# Altium PCB Recepteur.PcbDoc
Units mil, origin at the board's own origin, x right, y up, seen from the top; angles counter-clockwise.
Board outline 3937.01 x 3937.01 mil, 2 copper layers (Top Layer, Bottom Layer); 49 components, 27 nets, 122 pads, 14 vias.
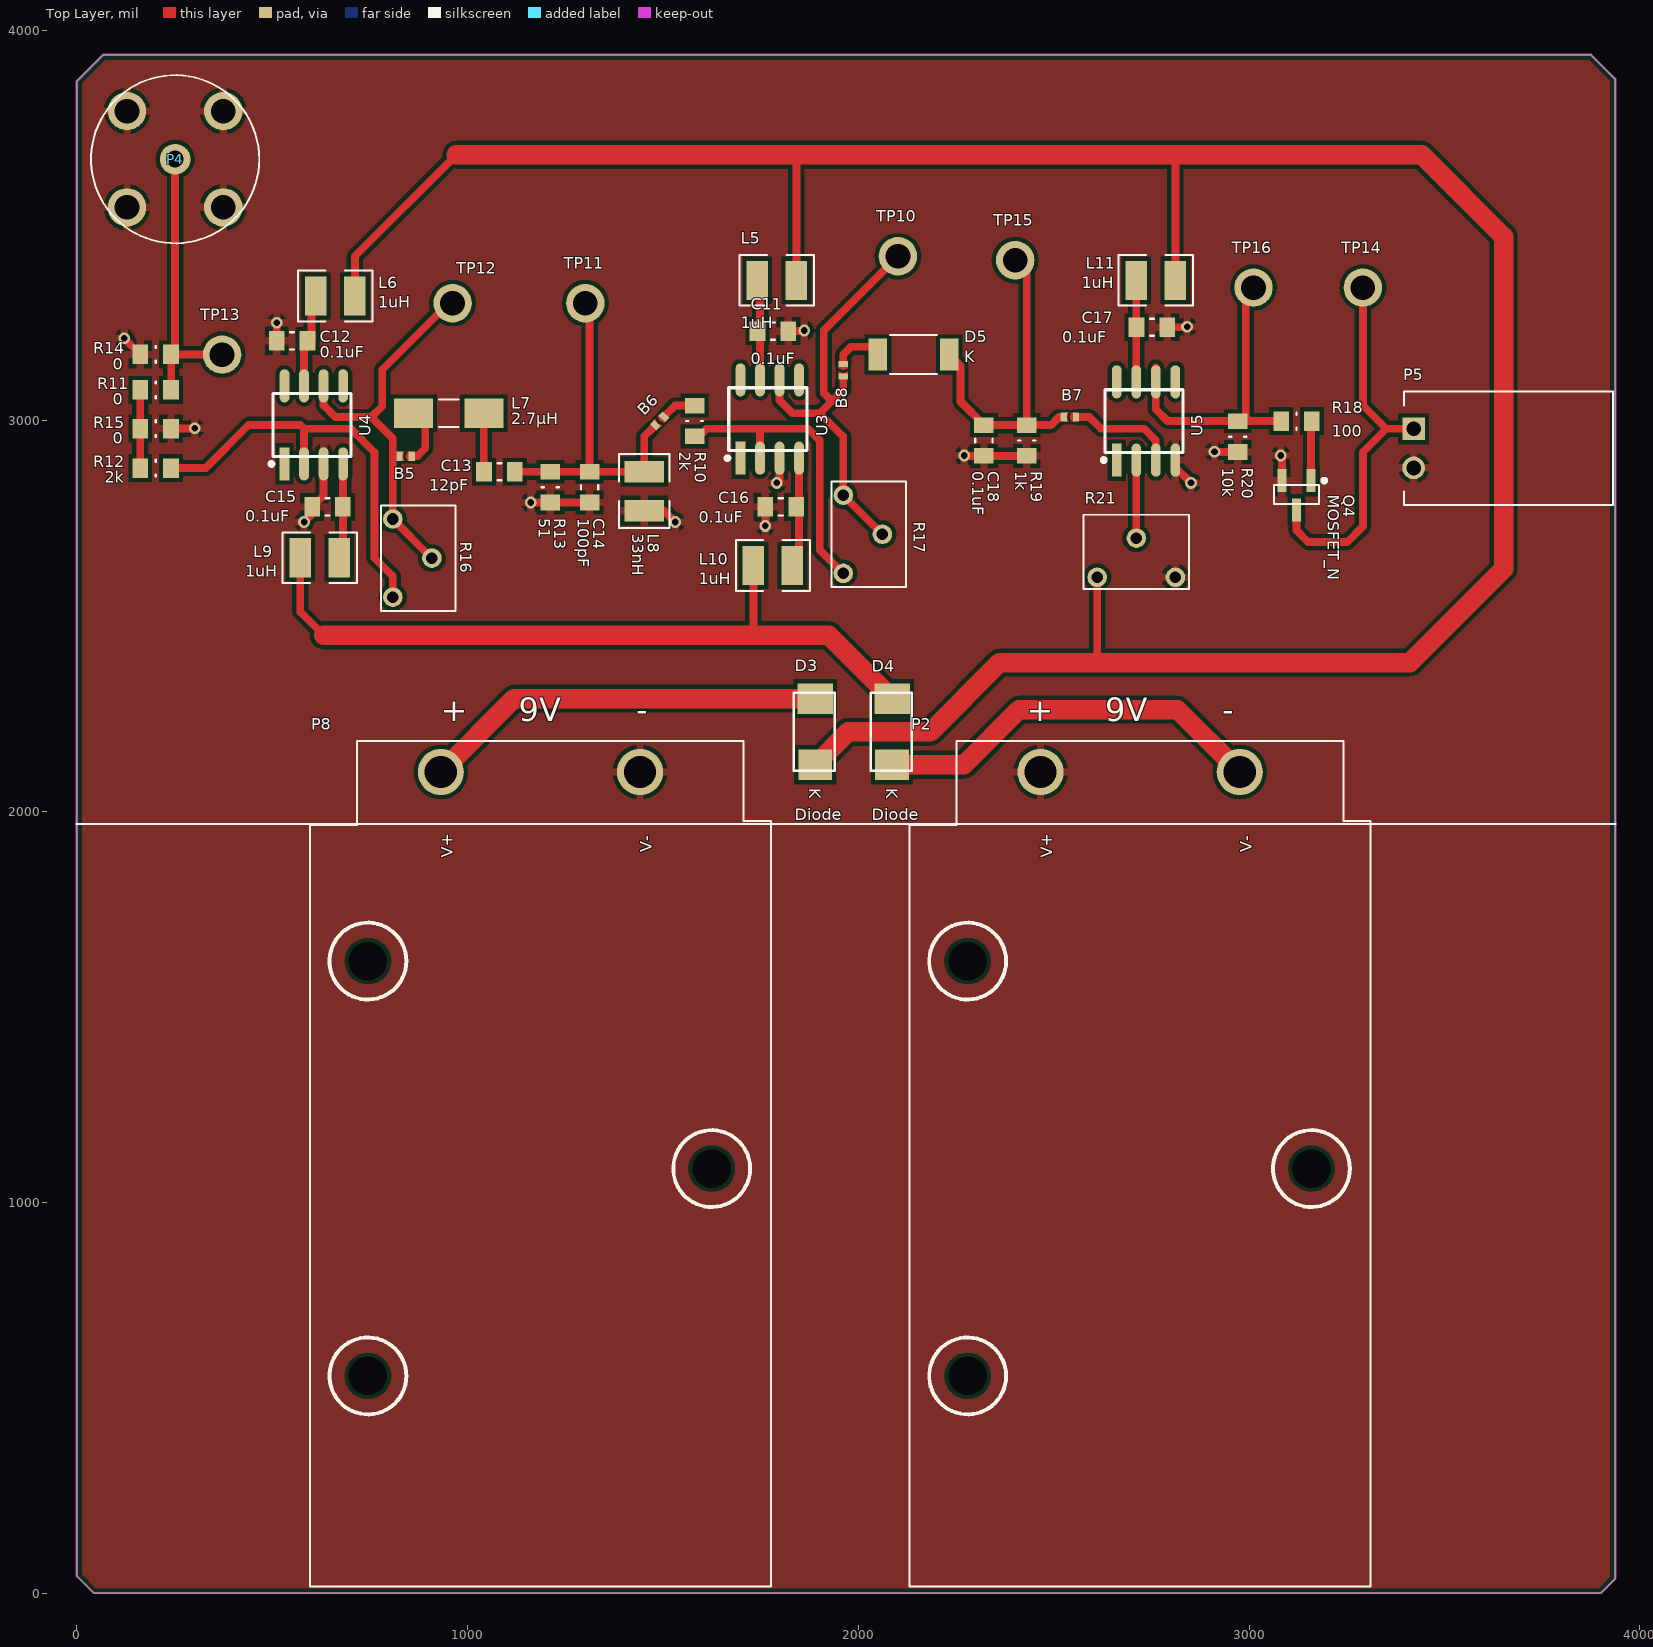
[diagram p0: Top Layer view]
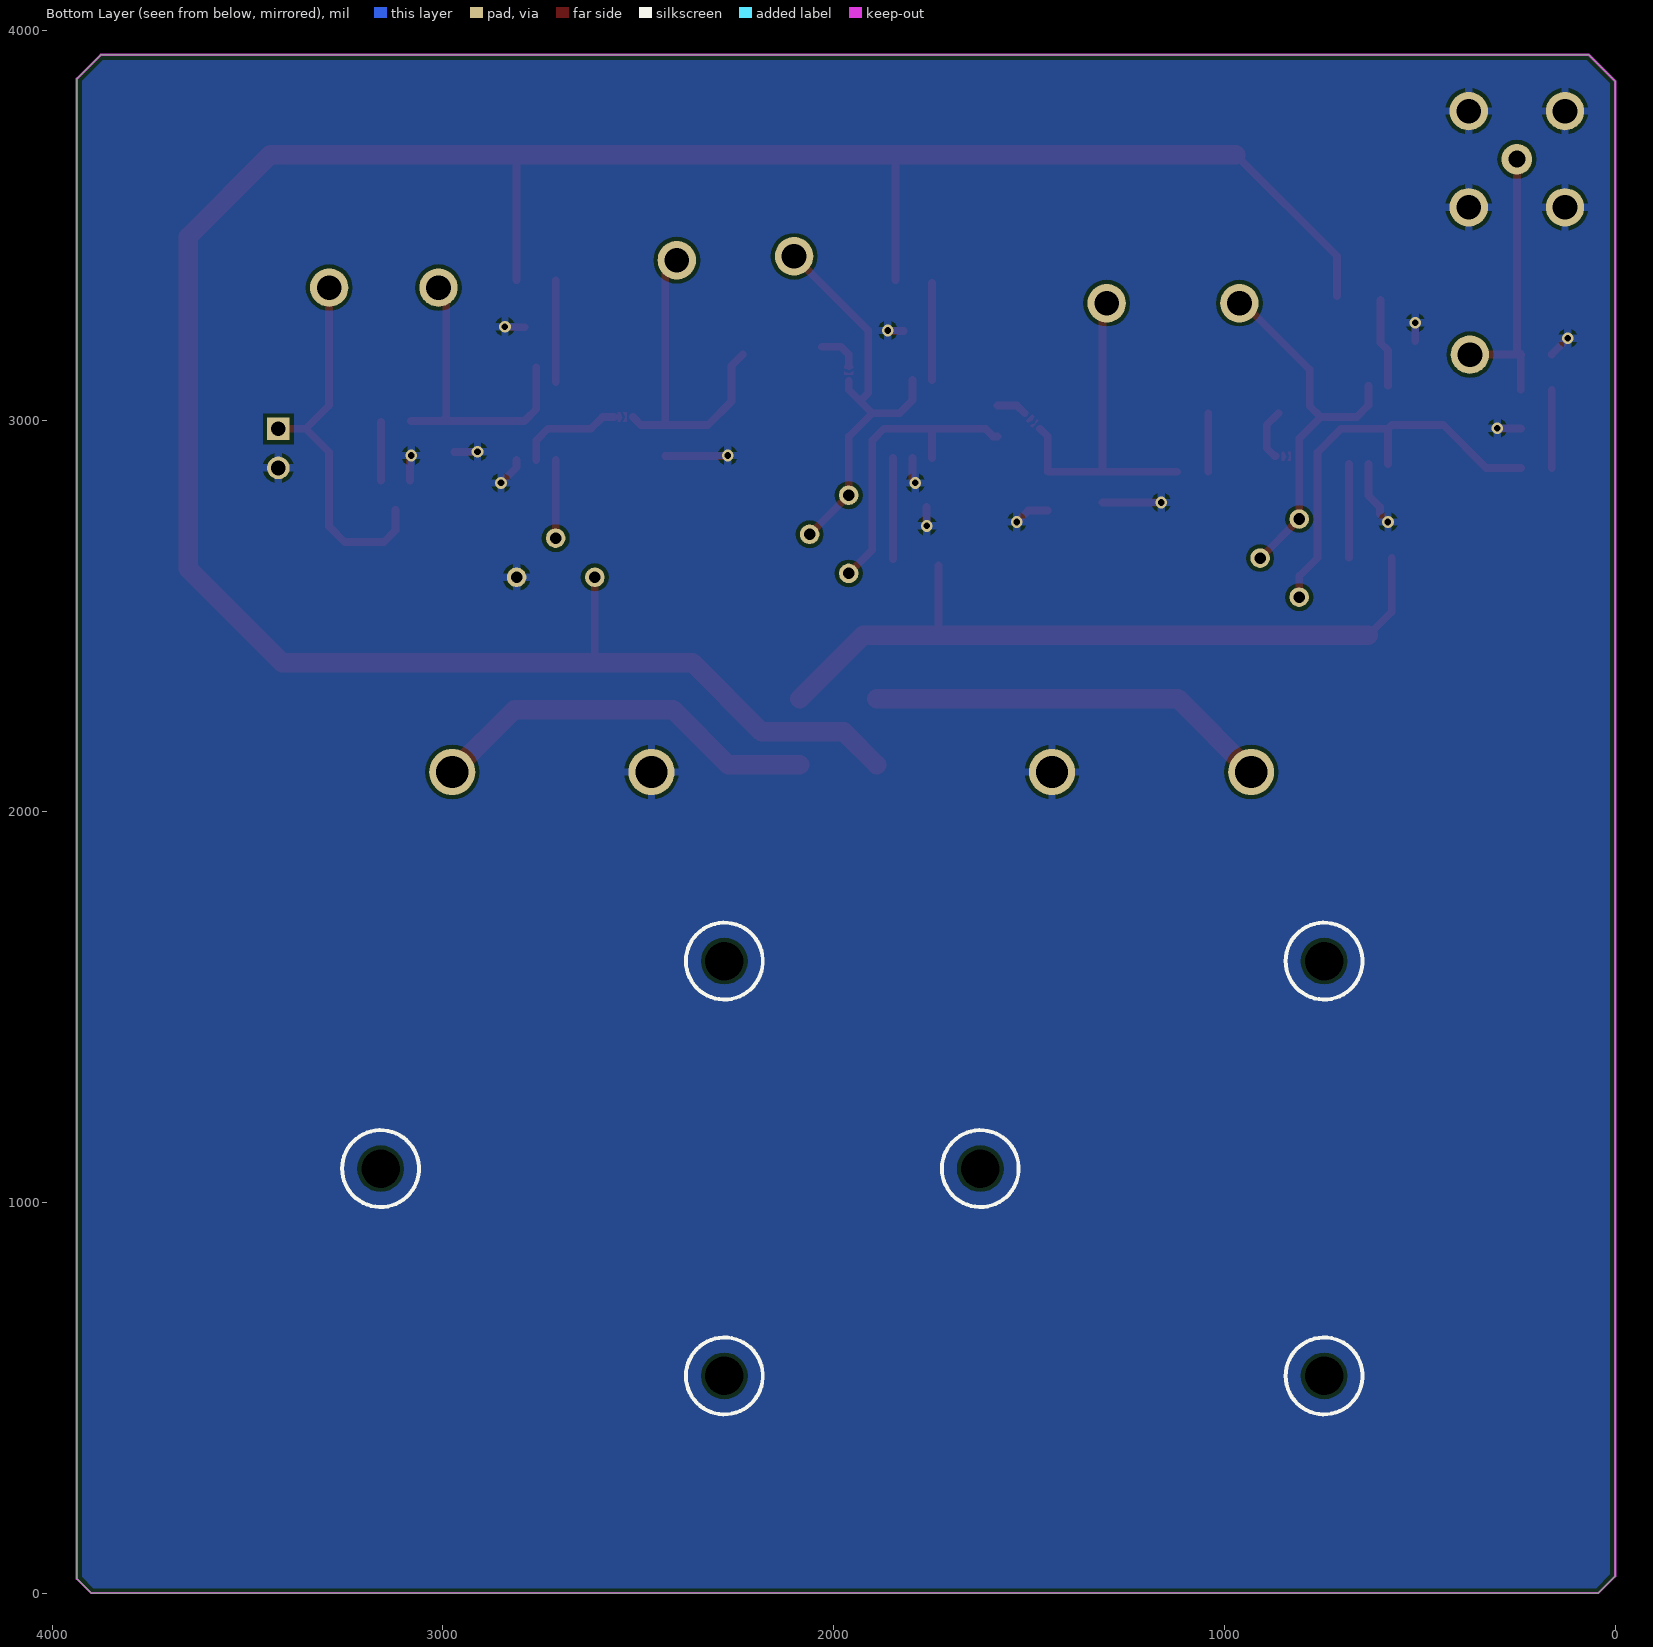
[diagram p1: Bottom Layer view, seen from below]
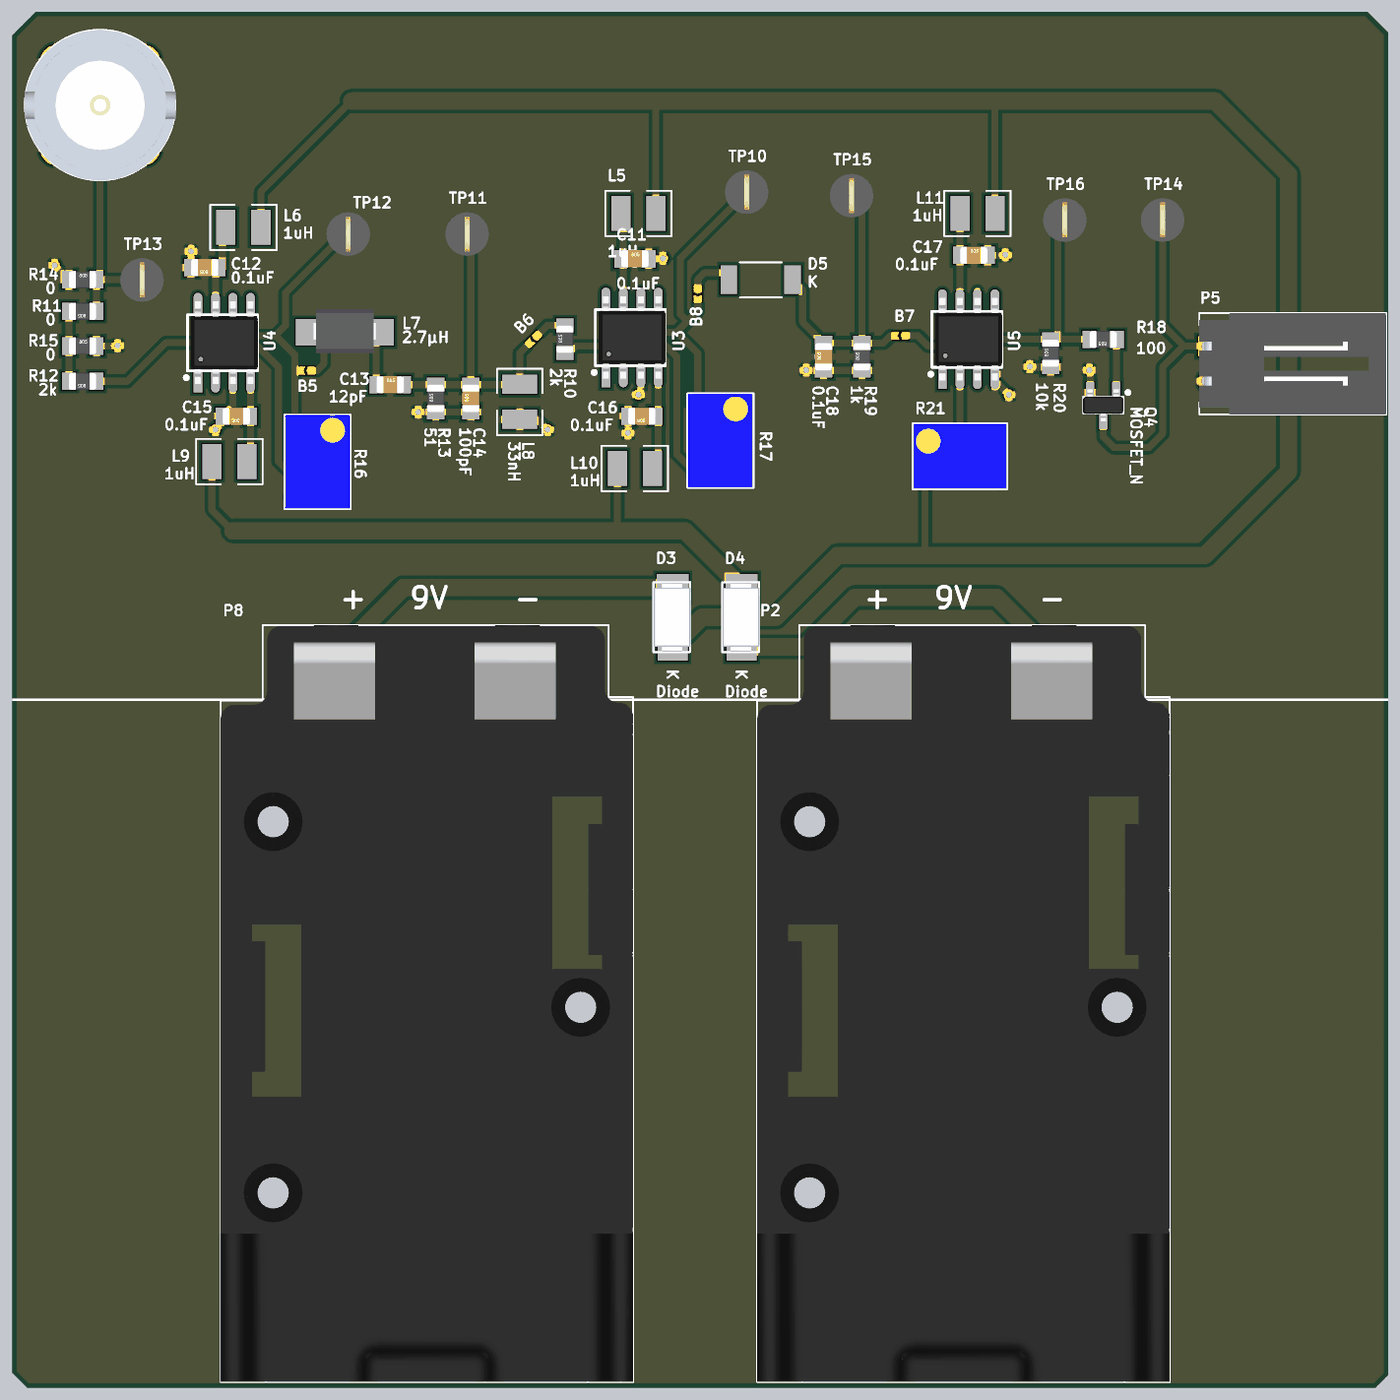
[diagram p2: 3D render of the assembled board from above, using the file's embedded part models]

## Layer stack, top to bottom
Top Layer: signal copper 1.4
Dielectric: dielectric 12.6, FR-4, Dk 4.8
Bottom Layer: signal copper 1.4

## Board outline
42.99,0 0,42.99 0,3870 67.01,3937.01 3875.98,3937.01 3937.01,3875.98 3937.01,37.01 3900,0

## Design rules (kind name [scope] priority, off if disabled: settings)
Clearance [HasFootprint('BRIDGE_SMALL')] p1: gap=6
Clearance Clearance_1 [All] p2: gap=10
HoleSize [All] p1: absolutevalues=TRUE maxlimit=100 minlimit=12 maxpercent=80.000 minpercent=20.000
MinimumSolderMaskSliver [All] p1: minsoldermaskwidth=8
PolygonConnect [All] p1: connectstyle=Relief reliefconductorwidth=20 reliefentries=4 polygonreliefangle="90 Angle"
RoutingVias [All] p1: holewidth=17 width=30 viastyle="Through Hole" minholewidth=17 minwidth=30 maxholewidth=28 maxwidth=50
SilkToSilkClearance [All] p1: silktosilkclearance=8
SilkscreenOverComponentPads [IsPad] p1: minsilkscreentomaskgap=8
SolderMaskExpansion [All] p1: expansion=4
Width [All] p1: maxlimit=50 minlimit=20 preferedwidth=20 minimp=50.000000 maximp=50.000000 favimp=50.000000
24 further rules are at their usual default settings.

## Components (designator, comment, footprint, x,y, rotation, side; value= is the part's Value field where it differs from the comment)
B5 "BRIDGE" BRIDGE_SMALL 841.5,2910 r0 top
B6 "BRIDGE" BRIDGE_SMALL 1491.5,3000 r45 top
B7 "BRIDGE" BRIDGE_SMALL 2541.5,3010 r0 top
B8 "BRIDGE" BRIDGE_SMALL 1961.5,3130 r90 top
C11 "0.1uF" "0805 - Cap Non-Polarized" 1781.5,3230 r0 top
C12 "0.1uF" "0805 - Cap Non-Polarized" 550.87,3205.01 r180 top
C13 "12pF" "0805 - Cap Non-Polarized" 1081.5,2870 r0 top
C14 "100pF" "0805 - Cap Non-Polarized" 1312.13,2830.64 r90 top
C15 "0.1uF" "0805 - Cap Non-Polarized" 641.5,2780 r180 top
C16 "0.1uF" "0805 - Cap Non-Polarized" 1801.5,2780 r180 top
C17 "0.1uF" "0805 - Cap Non-Polarized" 2751.5,3240 r0 top
C18 "0.1uF" "0805 - Cap Non-Polarized" 2321.5,2950 r90 top
D3 "Diode" "DOS-214AC (SMA)" 1889.76,2204.72 r270 top
D4 "Diode" "DOS-214AC (SMA)" 2086.61,2204.72 r270 top
D5 "Diode Schottky" SMBflat 2141.5,3170 r0 top
L5 "1uH" "1008 - INDUCTOR" 1791.5,3360 r0 top
L6 "1uH" "1008 - INDUCTOR" 661.5,3320 r0 top
L7 "2.7µH" "1812 - Inductor" 951.5,3020 r0 top
L8 "33nH" "1008 - INDUCTOR" 1452.13,2820.64 r90 top
L9 "1uH" "1008 - INDUCTOR" 621.5,2650 r0 top
L10 "1uH" "1008 - INDUCTOR" 1781.5,2630 r0 top
L11 "1uH" "1008 - INDUCTOR" 2761.5,3360 r0 top
P2 "Battery Holder" "Battery Holder - 9V - THT" 2466.5,2101.5 r90 top
P4 "Coax-F" Coax-BNC-THT-Vertical 251.5,3670 r0 top
P5 "Header 1X2" "Headers - 1x2 - R/A - Lock" 3421.5,2980 r270 top
P8 "Battery Holder" "Battery Holder - 9V - THT" 931.5,2101.5 r90 top
Q4 "MOSFET_N" SOT23-3 3121.5,2810 r270 top
R10 "2k" "0805 - Resistor" 1581.5,3000 r90 top
R11 "0" "0805 - Resistor" 201.5,3080 r180 top
R12 "2k" "0805 - Resistor" 201.5,2880 r180 top
R13 "51" "0805 - Resistor" 1212.13,2830.64 r90 top
R14 "0" "0805 - Resistor" 201.5,3170 r0 top
R15 "0" "0805 - Resistor" 201.5,2980 r0 top
R16 "Pot" TT-67Y 808.5,2749 r90 top
R17 "Pot" TT-67Y 1961.5,2810 r90 top
R18 "100" "0805 - Resistor" 3121.5,3000 r180 top
R19 "1k" "0805 - Resistor" 2431.5,2950 r90 top
R20 "10k" "0805 - Resistor" 2971.5,2960 r90 top
R21 "Pot" TT-67Y 2611.5,2600 r180 top
TP10 "TP" TP-THT-Vertical-1 2101.5,3421.5 r90 top
TP11 "TP" TP-THT-Vertical-1 1301.5,3301.5 r90 top
TP12 "TP" TP-THT-Vertical-1 961.5,3301.5 r90 top
TP13 "TP" TP-THT-Vertical-1 371.5,3170 r90 top
TP14 "TP" TP-THT-Vertical-1 3291.5,3341.5 r90 top
TP15 "TP" TP-THT-Vertical-1 2401.5,3411.5 r90 top
TP16 "TP" TP-THT-Vertical-1 3011.5,3341.5 r90 top
U3 "LM7121" "SOIC8 - 0.150" 1698.5,2905 r0 top
U4 "LM7121" "SOIC8 - 0.150" 531.5,2890 r0 top
U5 "LM7121" "SOIC8 - 0.150" 2661.5,2900 r0 top

## Footprints (in the part's own frame and the unit in brackets; to place one, negate y for a bottom-side part, rotate by r counter-clockwise, add the part's x,y. Pads: shape width x height; smd on the part's side, far side on the other; paste and mask are expansions set on the pad)
"0805 - Cap Non-Polarized" [mil]
  rect 40x50 smd: 1(-39.38,-0.01) 2(39.36,-0.01)
  silkscreen extent -5,-22 5,22, body extent -39,-25 39,25, height 31
"0805 - Resistor" [mil]
  rect 40x50 smd: 1(-39.38,0.39) 2(39.36,0.39)
  silkscreen extent 0,-21 0,22, body extent -39,-24 39,25, height 31
"1008 - INDUCTOR" [mil]
  rect 55x100 smd: 1(-50,0) 2(50,0)
  silkscreen extent -95,-65 95,65, body extent -49,-39 49,39, height 71
"1812 - Inductor" [mil]
  rect 100x75 smd: 1(-90,0) 2(90,0)
  silkscreen extent -25,-35 25,35, body extent -89,-60 89,66, height 126
"Battery Holder - 9V - THT" [mm]
  round 3 hole 2.1: 1(0,0) 2(0,-12.95)
  round 2 hole 2.5 unplated: ""(-39.26,4.74) ""(-25.78,-17.61) ""(-12.29,4.74)
  Bottom Overlay keep-out circle w0.254: c-39.26,4.74 r2.5
  Bottom Overlay keep-out circle w0.254: c-12.29,4.74 r2.5
  Bottom Overlay keep-out circle w0.254: c-25.78,-17.61 r2.5
  silkscreen extent -52.96,-21.46 2.03,8.51, body extent -52.96,-21.46 2.03,8.51, height 21.31
BRIDGE_SMALL [mm] "Chip Resistor, Body 1.6x0.8mm, IPC Medium Density"
  rect 0.4x0.6 smd paste-5: 1(-0.4,0) 2(0.4,0)
  Top Layer region: -0.08,0.3 -0.2,0 -0.08,-0.3 -0.3,-0.3 -0.3,0.3
  Top Layer region: 0.12,0.3 0,0 0.12,-0.3 0.3,-0.3 0.3,0.3
Coax-BNC-THT-Vertical [mm]
  round 2 hole 1.1: 1(0,0)
  round 2.5 hole 1.6: 2(3.13,3.13) 3(-3.13,3.13) 4(-3.13,-3.13) 5(3.13,-3.13)
  silkscreen extent -5.46,-5.47 5.47,5.47, body extent -5.5,-5.52 5.5,5.48, height 13.7
"DOS-214AC (SMA)" [mm]
  rect 2x2.3 smd: 1(-2.148,0)
  rect 2x2.2 smd: 2(2.148,0)
  silkscreen extent -2.54,-1.4 2.54,1.27, body extent -2.5,-1.39 2.5,1.31, height 2.15
"Headers - 1x2 - R/A - Lock" [mil]
  rect 58x58 hole 38: 1(0,0)
  round 58 hole 38: 2(100,0)
  silkscreen extent -95,-25 195,510, body extent -95,-25 195,510, height 280
SMBflat [mm]
  rect 1.2x2.07 smd: 1(-2.32,0) 2(2.32,0)
  silkscreen extent -1.52,-1.27 1.52,1.27
"SOIC8 - 0.150" [mil]
  rect 25x85 smd: 1(0,0)
  oval 25x85 smd: 2(50,0) 3(100,0) 4(150,0) 5(150,200) 6(100,200) 7(50,200) 8(0,200)
  silkscreen extent -38,-5 170,180, body extent -21,-18 171,218, height 67
SOT23-3 [mm]
  rect 1.5x0.6 smd: 1(-0.95,0.95) 2(-0.95,-0.95) 3(0.95,0)
  silkscreen extent -1.07,-1.45 0.58,1.93, body extent -1.19,-1.46 1.15,1.46, height 1
TP-THT-Vertical-1 [mm]
  round 2.5 hole 1.6: 1(0,0)
  body extent -1.6,-1.59 1.57,1.59, height 5.65
TT-67Y [mil]
  round 50 hole 30: 1(0,0) 2(-100,-100) 3(-200,0)
  silkscreen extent -235,-160 35,30, body extent -234,-158 34,28, height 323

## Part data
B5 B6 B7 B8: library part Jumper-solder, "Solder Jumper Bridge"
C11 C12 C15 C16 C17 C18: library part Cap-TDK-CGA-0.1uF-0805, "CAP CER 0.1UF 100V 10% X7R 0805"
C13: library part Cap-TDK-CGA-12pF-0805, "CAP CER 12PF 100V 5% NP0 0603"
C14: library part Cap-TDK-CGA-100pF-0805, "CAP CER 100PF 100V 5% NP0 0805"
D3 D4: library part S1M-13-F, "DIODE GEN PURPOSE 1000V 1A SMA"
D5: library part STPS2L40UF, "DIODE SCHOTTKY 40V 2A SMBFLAT"
L5 L6 L9 L10 L11: library part Murata-LQW2UA-Ind-AirCore-1uH, "IND 1000NH 370MA SRF 290MHZ 1008"
L7: library part Ind-Panasonic-FB-2.7µH-1812, "INDUCTOR 2.7 UH 10% 1812 SMD"
L8: library part Murata-LQW2UA-Ind-AirCore-33nH, "IND 33NH 1000MA SRF 1600MHZ 1008"
P2 P8: library part "Battery Holder-9V-THT-Open", "HOLDER BATTERY 9V PC MOUNT"
P4: library part coax-bnc-tht-vertical, "CONN BNC JACK STR 50 OHM PCB"
P5: library part Header-0.100-R/A-Lock-1X2
Q4: library part 2N7002, "MosFET Channel-N SOT-23-3 3.3A"
R10 R12: library part Yagao-RC0805-2k, "RES 2.0K OHM 1/8W 5% 0805 SMD"
R11 R14 R15: library part Jumper-0805, "RES 0.0 OHM 1/8W JUMP 0805"
R13: library part Yagao-RC0805-51, "RES 51 OHM 1/8W 5% 0805 SMD"
R16 R17 R21: library part Pot-TT67Y-20Turns-THT-10%-10k, "TRIMMER 10K OHM 0.5W TH"
R18: library part Yagao-RC0805-100, "RES 100 OHM 1/8W 5% 0805 SMD"
R19: library part Yagao-RC0805-1k, "RES 1.0K OHM 1/8W 5% 0805 SMD"
R20: library part Yagao-RC0805-10k, "RES 10K OHM 1/8W 5% 0805 SMD"
TP10 TP11 TP12 TP13 TP14 TP15 TP16: library part TP-THT-Vertical-1, "TEST POINT PC COMPACT .063\"D BLK"
U3 U4 U5: library part LM7121-8SOIC, "IC OPAMP VFB 175MHZ 8SOIC"

## Via types
v1: diameter 30, hole 17, Top Layer to Bottom Layer, 14 vias

## Nets (pads, with @x,y where several pads share a name; then routed paths per layer and width w, separated by ;. In a path a pad name is that pad's centre, name@x,y a point inside that pad or via, vN(x,y) a via of type N, cw(c..) or ccw(c..) an arc to the next point about the centre after c; other vN are vias at no path point)
+9V: D3.2 L5.2 L6.2 L11.2 R21.1 | length 6907.1
  Top Layer w20: L6.2 711.5,3421.5 971.5,3681.5 ; L5.2 1841.5,3681.5 ; 2611.5,2381.5 R21.1 ; L11.2 2811.5,3671.5
  Top Layer w50: 971.5,3681.5 1841.5,3681.5 3441.5,3681.5 3651.5,3471.5 3651.5,2621.5 3411.5,2381.5 2611.5,2381.5 2361.5,2381.5 2184.5,2204.5 1974.1,2204.5 D3.2
-9V: D4.1 L9.1 L10.1 | length 1914.2
  Top Layer w20: L9.1 571.5,2511.5 631.5,2451.5 ; 1731.5,2461.5 L10.1
  Top Layer w50: 631.5,2451.5 1924.41,2451.5 D4.1
COM: C11.2 C12.2 C14.1 C15.2 C16.2 C17.2 C18.1 L8.1 P2.1 P4.2 P4.3 P4.4 P4.5 P5.2 P8.2 Q4.2 R13.1 R14.1 R15.2 R19.1 R20.1 R21.3 U3.3 U4.3 U5.4 | length 1144.8
  Top Layer w20: v1(121.5,3211.5) 121.5,3211.01 R14.1 ; R15.2 300.39,2980.39 v1(301.5,2981.5) ; C12.2 v1(511.5,3251.5) ; v1(581.5,2741.5) 602.13,2762.13 C15.2 631.5,2809.37 U4.3 ; v1(1161.5,2791.5) 1161.73,2791.26 R13.1 C14.1 ; L8.1 1502.36,2770.64 v1(1531.5,2741.5) ; v1(1761.5,2731.5) 1762.13,2732.13 C16.2 ; v1(1791.5,2841.5) 1798.5,2848.5 U3.3 ; C11.2 1859.99,3229.99 v1(1861.5,3231.5) ; v1(2271.5,2911.5) 2272.37,2910.62 C18.1 R19.1 ; C17.2 2839.99,3239.99 v1(2841.5,3241.5) ; U5.4 2811.5,2881.5 v1(2851.5,2841.5) ; v1(2911.5,2921.5) 2912.37,2920.62 R20.1 ; v1(3081.5,2911.5) 3084.09,2908.9 Q4.2
NetB5_1: B5.1 R16.1 R16.2 TP12.1 U4.6 | length 983.2
  Top Layer w20: U4.6 631.5,3040 661.5,3010 753.69,3010 ; R16.2 R16.1 808.5,2955.19 753.69,3010 ; TP12.1@951.5,3301.5 781.5,3131.5 781.5,3037.81 753.69,3010
NetB5_2: B5.2 L7.1 | length 132.9
  Top Layer w20: L7.1 891.5,2990 891.5,2930 871.5,2910 869.31,2910
NetB6_1: B6.1 C13.2 C14.2 L8.2 R13.2 TP11.1 | length 904.4
  Top Layer w20: C13.2 R13.2 C14.2 ; TP11.1@1301.5,3321.5 1312.14,3310.85 C14.2 ; L8.2@1451.5,2870 C14.2 ; L8.2 1452.13,2960.64 1471.83,2980.33
NetB6_2: B6.2 R10.2 | length 78.1
  Top Layer w20: 1511.16,3019.67 1530.86,3039.36 R10.2
NetB7_1: B7.1 C18.2 D5.2 R19.2 TP15.1 | length 852.1
  Top Layer w20: D5.2 2261.5,3141.33 2261.5,3050 2322.14,2989.36 R19.2 ; TP15.1 2431.11,3381.88 R19.2 ; 2513.69,3010 2493.05,2989.36 R19.2
NetB7_2: B7.2 U5.3 | length 274.9
  Top Layer w20: B7.2@2561.5,3010 2591.5,3010 2621.5,2980 2731.5,2980 2761.5,2950 U5.3
NetB8_1: B8.1 R17.1 R17.2 TP10.1 U3.6 | length 1109
  Top Layer w20: U3.6 1798.5,3053 1831.5,3020 1901.5,3020 ; 1931.5,3051.5 1911.5,3071.5 1911.5,3231.5 TP10.1 ; 1961.5,3102.19 1961.5,3080 1901.5,3020 ; R17.2 R17.1 1961.5,2960 1901.5,3020
NetB8_2: B8.2 D5.1 | length 101.2
  Top Layer w20: B8.2 1961.5,3170 1981.5,3190 D5.1@2030.16,3190
NetC11_1: C11.1 L5.1 U3.7 | length 248
  Top Layer w20: U3.7 L5.1@1748.5,3353
NetC12_1: C12.1 L6.1 U4.7 | length 227.4
  Top Layer w20: U4.7 581.5,3180.63 600.87,3200.01 L6.1@600.87,3309.38
NetC13_1: C13.1 L7.2 | length 149.4
  Top Layer w20: C13.1@1041.5,2870.62 L7.2
NetC15_1: C15.1 L9.2 U4.4 | length 240
  Top Layer w20: L9.2@681.5,2650 U4.4
NetC16_1: C16.1 L10.2 U3.4 | length 258
  Top Layer w20: L10.2@1848.5,2647 U3.4
NetC17_1: C17.1 L11.1 U5.7 | length 260
  Top Layer w20: U5.7 L11.1
NetD3_1: D3.1 P8.1 | length 1036.1
  Top Layer w50: P8.1 1119.29,2289.29 D3.1
NetD4_2: D4.2 P2.2 | length 1014.5
  Top Layer w50: D4.2 2270.16,2120.16 2411.5,2261.5 2816.34,2261.5 P2.2
NetP4_1: P4.1 R11.1 R14.2 TP13.1 | length 724.4
  Top Layer w20: R11.1@241.5,3080.24 R14.2@241.5,3170.39 ; P4.1 251.5,3181.02 R14.2 R14.2@241.5,3170.39 ; TP13.1@371.11,3170.39 R14.2@241.5,3170.39
NetP5_1: P5.1 Q4.3 TP14.1 | length 962.8
  Top Layer w20: Q4.3 3121.5,2720 3151.5,2690 3251.5,2690 3291.5,2730 3291.5,2920 3351.5,2980 ; TP14.1@3291.5,3321.5 3291.5,3040 3351.5,2980 ; P5.1 3351.5,2980
NetQ4_1: Q4.1 R18.1 | length 150.2
  Top Layer w20: Q4.1 R18.1@3158.9,2997.64
NetR10_1: R10.1 R17.3 U3.2 | length 777.7
  Top Layer w20: R10.1 1592.12,2960.62 1611.5,2980 1871.5,2980 1901.5,2950 1901.5,2670 R17.3 ; U3.2 1748.5,2977
NetR11_2: R11.2 R12.2 R15.1 | length 200
  Top Layer w20: R12.2 R11.2
NetR12_1: R12.1 R16.3 U4.2 | length 1075.8
  Top Layer w20: R12.1 329.61,2879.61 440,2990 571.5,2990 581.5,2980 ; U4.2 581.5,2980 ; R16.3 808.5,2603 761.5,2650 761.5,2920 701.5,2980 581.5,2980
NetR18_2: R18.2 R20.2 TP16.1 U5.6 | length 785.7
  Top Layer w20: U5.6@2761.5,3137.35 U5.6 2761.5,3030 2791.5,3000 3001.5,3000 ; TP16.1@2991.5,3341.5 2991.5,3010 3001.5,3000 ; R18.2@3081.75,3000 3001.5,3000
NetR21_2: R21.2 U5.2 | length 200
  Top Layer w20: R21.2 U5.2
pads on no net: P2. P8. U3.1 U3.5 U3.8 U4.1 U4.5 U4.8 U5.1 U5.5 U5.8

## Polygon pours and split planes (outlines as drawn)
COM on Top Layer "Top Layer-No Net" (solid, remove dead copper, pour order 4): 0,3937.01 3937.01,3937.01 3937.01,0 0,0
COM on Bottom Layer "Top Layer-No Net" (solid, remove dead copper, pour order 3): 0,3937.01 3937.01,3937.01 3937.01,0 0,0

## Keep-outs
Keep-Out Layer:
  the board outline again, w6

## Silkscreen, mask and mechanical layers (free items; w line width, h text height)
Top Overlay:
  lines w6: 0,1968.5 3937.01,1968.5
  text "+" at 931.5,2231.5 h60
  text "9V" at 1131.5,2231.5 h60
  text "-" at 1431.5,2231.5 h60
  text "+" at 2431.5,2231.5 h60
  text "9V" at 2631.5,2231.5 h60
  text "-" at 2931.5,2231.5 h60

## Dimensions
0,42.99 to 3875.98,0.98 on Mechanical 1
42.99,0 to 67.01,3937.01 on Mechanical 1

## Text inside footprints (layer, text, board x,y; h text height)
D3: Top Overlay "K" at 1874.76,2059.72 h30 r270
D4: Top Overlay "K" at 2071.61,2059.72 h30 r270
D5: Top Overlay "K" at 2271.5,3150 h30
P2: Top Overlay "V+" at 2496.5,1881.5 h30 r90; Top Overlay "V-" at 3006.5,1896.5 h30 r90
P8: Top Overlay "V+" at 961.5,1881.5 h30 r90; Top Overlay "V-" at 1471.5,1896.5 h30 r90